# Altium PCB LEDConverter.PcbDoc
Units mm, origin at the board's own origin, x right, y up, seen from the top; angles counter-clockwise.
Board outline 30.4 x 49.6 mm, 2 copper layers (Top Layer, Bottom Layer); 16 components, 13 nets, 38 pads, 36 vias.
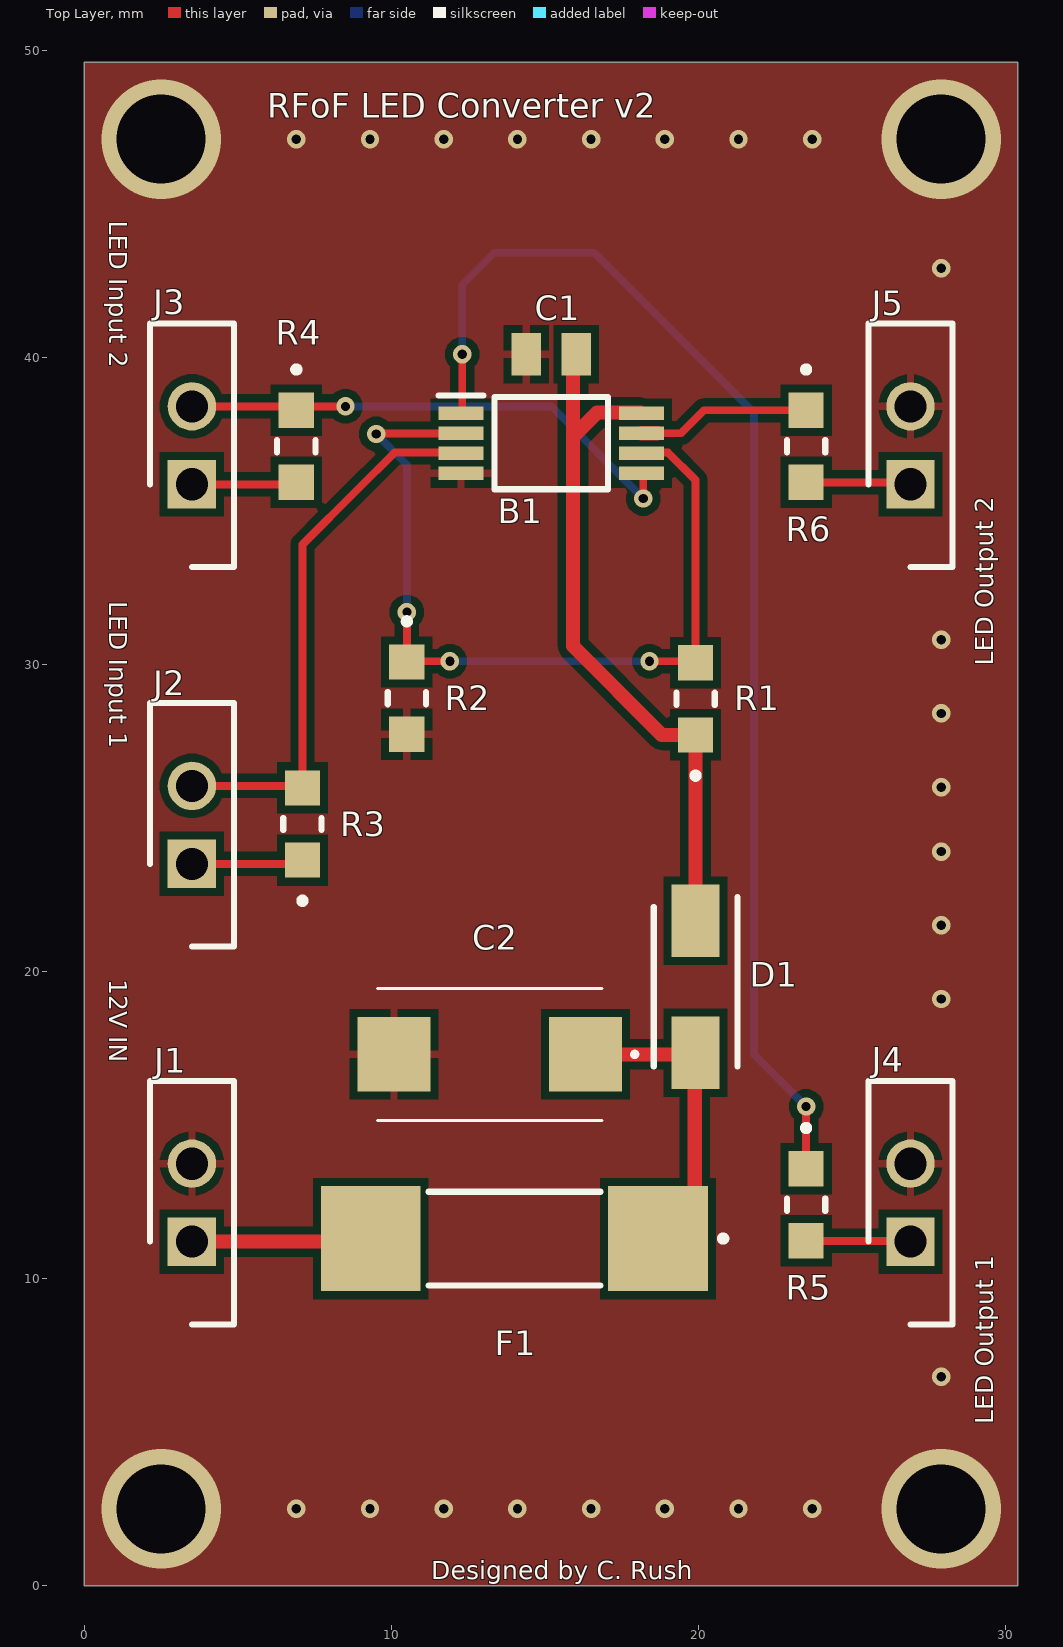
[diagram p0: Top Layer view]
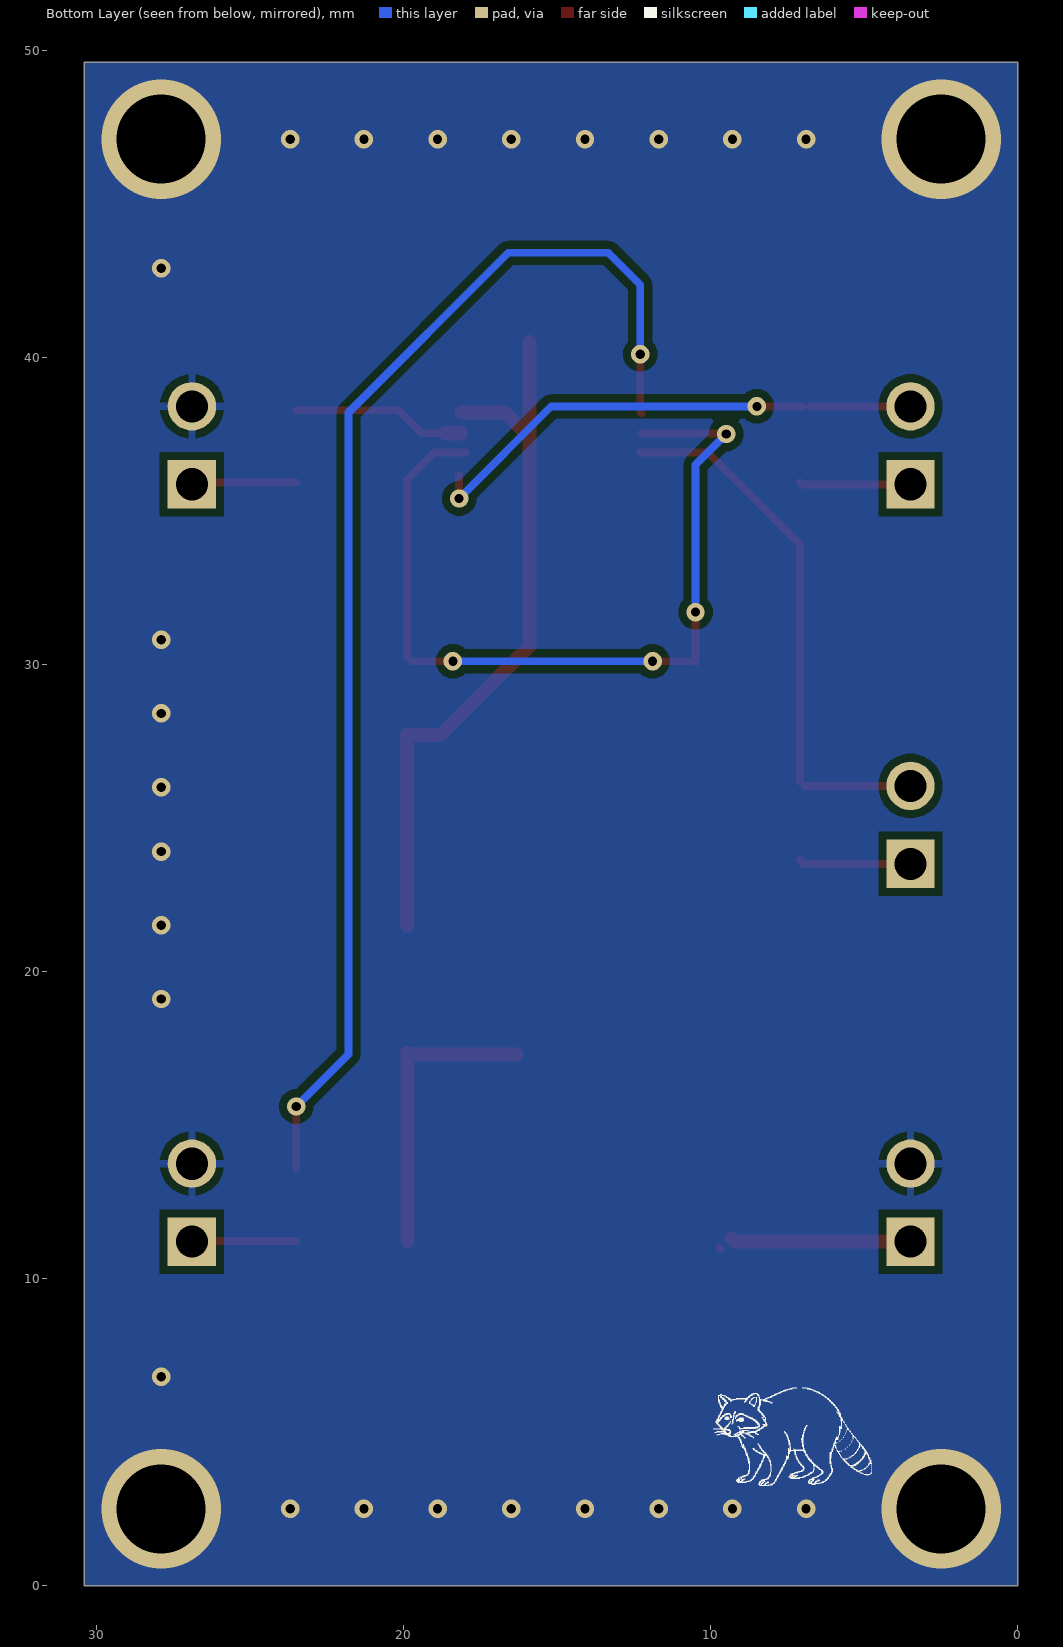
[diagram p1: Bottom Layer view, seen from below]

## Layer stack, top to bottom
Top Solder: solder mask 0.0102, Solder Resist, Dk 3.5
Top Layer: signal copper 0.0356
Dielectric 1: dielectric 0.32, FR-4, Dk 4.8
Bottom Layer: signal copper 0.0356
Bottom Solder: solder mask 0.0102, Solder Resist, Dk 3.5

## Board outline
0,0 0,49.6 30.4,49.6 30.4,0

## Design rules (kind name [scope] priority, off if disabled: settings)
Clearance [InNet('GND')] p1: gap=0.254 ignorepadtopadclearanceinfootprint=TRUE
ComponentClearance [All] p1: gap=0.01 collisioncheckmode=3 verticalgap=2540 showdistances=FALSE
PlaneConnect [InNet('GND')] p1: pad.planeconnectstyle=Relief pad.reliefexpansion=0.508 pad.reliefentries=4 pad.reliefconductorwidth=0.254 pad.reliefairgap=0.254 via.planeconnectstyle=Direct via.reliefexpansion=0.508 via.reliefentries=4 via.reliefconductorwidth=0.254 via.reliefairgap=0.254
PolygonConnect [All] p1: thpad.connectstyle=Relief thpad.reliefconductorwidth=0.254 thpad.reliefentries=4 thpad.polygonreliefangle="90 Angle" thpad.airgapwidth=0.254 smdpad.connectstyle=Relief smdpad.reliefconductorwidth=0.254 smdpad.reliefentries=4 smdpad.polygonreliefangle="90 Angle" smdpad.airgapwidth=0.254 via.connectstyle=Direct via.reliefconductorwidth=0.254 via.reliefentries=4 via.polygonreliefangle="90 Angle" via.airgapwidth=0.254
RoutingVias [All] p1: holewidth=0.711 width=1.27 viastyle="Through Hole" minholewidth=0.711 minwidth=1.27 maxholewidth=0.711 maxwidth=1.27
SolderMaskExpansion [All] p1: expansion=0.102 istentingtop=FALSE
SupplyNets "Schematic Supply Nets_1" [InNet('6V')] p1: voltage=0.000
SupplyNets "Schematic Supply Nets" [InNet('GND')] p2: voltage=0.000
UnpouredPolygon [InNet('GND')] p1:
Width [All] p1: maxlimit=0.762 minlimit=0.254 preferedwidth=0.254 minimp=50.000000 maximp=50.000000 favimp=50.000000
27 further rules are at their usual default settings.

## Components (designator, comment, footprint, x,y, rotation, side; value= is the part's Value field where it differs from the comment)
B1 "TLC3702IPWR" SOP65P640X120-8N 15.2,37.2 r0 top (schematic designator B?)
C1 "VJ0805Y105KXQTW1BC" CAPC2012X135N 15.2,40.1 r180 top
C2 "T491X107K025AT" T491X 13.2,17.3 r180 top
D1 "S1M" DIOM5227X270N 19.9,19.5 r270 top
F1 "0443.500DRLC" 0443500DR 14,11.3 r180 top
J1 "42375-1855" HDRV2W87P0X254_1X2_768X249X1494P 3.5,11.2 r90 top
J2 "42375-1855" HDRV2W87P0X254_1X2_768X249X1494P 3.5,23.5 r90 top
J3 "42375-1855" HDRV2W87P0X254_1X2_768X249X1494P 3.5,35.86 r90 top locked
J4 "42375-1855" HDRV2W87P0X254_1X2_768X249X1494P 26.9,11.2 r90 top locked
J5 "42375-1855" HDRV2W87P0X254_1X2_768X249X1494P 26.9,35.86 r90 top locked
R1 "2k Resistor" ERA6AEB101V 19.9,28.875 r90 top
R2 "2k Resistor" ERA6AEB101V 10.5,28.9 r270 top
R3 "2k Resistor" ERA6AEB101V 7.1,24.8 r90 top
R4 "2k Resistor" ERA6AEB101V 6.9,37.1 r270 top
R5 "2k Resistor" ERA6AEB101V 23.5,12.4 r270 top locked
R6 "2k Resistor" ERA6AEB101V 23.5,37.1 r270 top locked

## Footprints (in the part's own frame and the unit in brackets; to place one, negate y for a bottom-side part, rotate by r counter-clockwise, add the part's x,y. Pads: shape width x height; smd on the part's side, far side on the other; paste and mask are expansions set on the pad)
0443500DR [mm]
  rect 3.25x3.43 smd: 1(-4.675,0) 2(4.675,0)
  silkscreen extent -6.9,-1.53 2.8,1.53, body extent -5.04,-1.53 5.04,1.53, height 3.05
CAPC2012X135N [mm]
  rect 0.96x1.39 smd: 1(-0.81,0) 2(0.81,0)
DIOM5227X270N [mm]
  rect 2.35x1.55 smd: 1(-2.15,0) 2(2.15,0)
  silkscreen extent -2.93,-1.36 2.6,1.36
ERA6AEB101V [mm]
  rect 1.15x1.15 smd: 1(-1.175,0) 2(1.175,0)
  silkscreen extent -2.6,-0.63 0.2,0.63
HDRV2W87P0X254_1X2_768X249X1494P [mm]
  rect 1.575x1.575 / inner round 1.575 / far side rect 1.575x1.575 hole 1.05: 1(0,0)
  round 1.575 hole 1.05: 2(2.54,0)
  silkscreen extent -2.7,-1.37 5.24,1.37
SOP65P640X120-8N [mm]
  rect 1.475x0.45 smd: 1(-2.938,0.975) 2(-2.938,0.325) 3(-2.938,-0.325) 4(-2.938,-0.975) 5(2.938,-0.975) 6(2.938,-0.325) 7(2.938,0.325) 8(2.938,0.975)
  silkscreen extent -3.67,-1.5 1.85,1.55
T491X [mm]
  rect 2.37x2.43 smd: 1(-3.12,0) 2(3.12,0)
  silkscreen extent -4.77,-2.15 3.65,2.15, body extent -3.8,-2.3 3.8,2.3, height 4.31

## Part data
B1: "Texas Instruments TLC3702IPWR Dual Comparator, Push-Pull O/P, 5 V 8-Pin TSSOP", Manufacturer_Name="Texas Instruments", Mouser Part Number=595-TLC3702IPWR, Datasheet Link=http://www.ti.com/lit/gpn/TLC3702, Geometry.Height=1.2mm, Manufacturer_Part_Number=TLC3702IPWR, Mouser Price/Stock=https://www.mouser.co.uk/ProductDetail/Texas-Instruments/TLC3702IPWR?qs=p6lVfQR1GSqrayQICnP15w%3D%3D
C1: "Multilayer Ceramic Capacitors MLCC - SMD/SMT 0805 1uF 10volts X7R 10%", Manufacturer_Name=Vishay, Mouser Part Number=77-VJ0805Y105KXQTBC, Datasheet Link=https://www.vishay.com/docs/28548/vjw1bcbascomseries.pdf, Geometry.Height=1.35mm, Manufacturer_Part_Number=VJ0805Y105KXQTW1BC, Mouser Price/Stock=https://www.mouser.co.uk/ProductDetail/Vishay-Vitramon/VJ0805Y105KXQTW1BC?qs=F2lBERbFaaHnNHh23%2Flzkg%3D%3D
C2: "Capacitor Polarised", Manufacturer_Name=KEMET, Mouser Part Number=80-T491X107K025AT, Arrow Part Number=T491X107K025AT, Arrow Price/Stock=https://www.arrow.com/en/products/t491x107k025at/kemet-corporation?utm_currency=USD&region=nac, Datasheet Link=https://content.kemet.com/datasheets/KEM_T2005_T491.pdf, Height=4.3mm, Manufacturer_Part_Number=T491X107K025AT, Mouser Price/Stock=https://www.mouser.co.uk/ProductDetail/KEMET/T491X107K025AT?qs=QpHsZXO%252BQJ%252BKFgQiUckA6A%3D%3D
D1: "Glass passivated junction.; Low profile package.", Manufacturer_Name=onsemi, Mouser Part Number=512-S1M, Datasheet Link=https://www.onsemi.com/pub/Collateral/S1M-D.PDF, Geometry.Height=2.7mm, Manufacturer_Part_Number=S1M, Mouser Price/Stock=https://www.mouser.co.uk/ProductDetail/onsemi-Fairchild/S1M?qs=RJwZ8kJo1mhFujnIpzoJdg%3D%3D
F1: "Fuse", Manufacturer_Name=LITTELFUSE, Mouser Part Number=576-0443.500DRLC, Arrow Part Number=0443.500DRLC, Arrow Price/Stock=https://www.arrow.com/en/products/0443.500drlc/littelfuse?region=nac, Datasheet Link=https://www.littelfuse.com/~/media/electronics/datasheets/fuses/littelfuse_fuse_443_datasheet.pdf.pdf, Height=3.05mm, Manufacturer_Part_Number=0443.500DRLC, Mouser Price/Stock=https://www.mouser.co.uk/ProductDetail/Littelfuse/0443.500DRLC?qs=AQlKX63v8RvHlKjIINnTsQ%3D%3D
J1 J2 J3 J4 J5: "Headers & Wire Housings KK 100 Hdr Assy Bkw 02 Ckt Tin", Manufacturer_Name=Molex, Mouser Part Number=538-42375-1855, Datasheet Link=https://componentsearchengine.com/Datasheets/1/42375-1855.pdf, Geometry.Height=14.94mm, Manufacturer_Part_Number=42375-1855, Mouser Price/Stock=https://www.mouser.com/Search/Refine.aspx?Keyword=538-42375-1855
R1 R2 R3 R4 R5 R6: library part ERA-6AED4990V, "Metal Thin Film Chip Resistor, 0805, 0.125W", Manufacturer_Name=Panasonic, Datasheet Link=https://industrial.panasonic.com/cdbs/www-data/pdf/RDM0000/AOA0000C307.pdf, Geometry.Height=0.6mm, Manufacturer_Part_Number=ERA-6AED4990V

## Via types
v1: diameter 0.6, hole 0.3, Top Layer to Bottom Layer, 32 vias
v2: diameter 3.9, hole 2.9, Top Layer to Bottom Layer, 4 vias

## Nets (pads, with @x,y where several pads share a name; then routed paths per layer and width w, separated by ;. In a path a pad name is that pad's centre, name@x,y a point inside that pad or via, vN(x,y) a via of type N, cw(c..) or ccw(c..) an arc to the next point about the centre after c; other vN are vias at no path point)
6V: B1.2 B1.6 R1.2 R2.1 | length 27.9
  Top Layer w0.254: v1(9.5,37.5) 9.512,37.513 12.25,37.513 B1.2 ; R2.1 v1(10.5,31.7) ; R2.1@10.525,30.1 v1(11.9,30.1) ; B1.6@17.982,36.9 19,36.9 19.9,36 R1.2@19.9,30.249 ; v1(18.4,30.1) R1.2@19.751,30.1
  Bottom Layer w0.254: v1(9.5,37.5) 10.5,36.5 v1(10.5,31.7) ; v1(11.9,30.1) v1(18.4,30.1)
GND: B1.4 C1.2 C2.2 J1.2 J4.2 J5.2 R2.2
  other v1: 6.9,2.5 9.3,2.5 11.7,2.5 14.1,2.5 16.5,2.5 18.9,2.5 21.3,2.5 23.7,2.5 27.9,6.8 27.9,19.1 27.9,21.5 27.9,23.9 27.9,26 27.9,28.4 27.9,30.8 27.9,42.9 6.9,47.1 9.3,47.1 11.7,47.1 14.1,47.1 16.5,47.1 18.9,47.1 21.3,47.1 23.7,47.1
  other v2: 2.5,2.5 27.9,2.5 2.5,47.1 27.9,47.1
NetB1_1: B1.1 R5.1 | length 41.6
  Top Layer w0.254: B1.1 12.3,38.213 v1(12.3,40.1) ; R5.1 v1(23.5,15.6)
  Bottom Layer w0.254: v1(12.3,40.1) 12.3,42.359 13.341,43.4 16.6,43.4 21.8,38.2 21.8,17.3 v1(23.5,15.6)
NetB1_3: B1.3 J2.2 R3.2 | length 17.6
  Top Layer w0.254: J2.2 R3.2@6.951,26.04 ; R3.2@7.1,26.189 7.1,33.9 8.9,35.7 10.1,36.9 B1.3@12.3,36.9
NetB1_5: B1.5 J3.2 R4.1 | length 16.5
  Top Layer w0.254: J3.2 R4.1@6.775,38.4 ; R4.1@7.025,38.4 v1(8.5,38.4) ; v1(18.2,35.4) B1.5@18.2,36.163
  Bottom Layer w0.254: v1(8.5,38.4) 15.2,38.4 v1(18.2,35.4)
NetB1_7: B1.7 R6.1 | length 5.7
  Top Layer w0.254: B1.7@18.643,37.525 19.425,37.525 20.175,38.275 R6.1
  Top Layer w0.457: B1.7 B1.7@18.643,37.525
NetB1_8: B1.8 C1.1 D1.1 R1.1 | length 23.9
  Top Layer w0.254: B1.8@18.113,38.2 B1.8
  Top Layer w0.457: C1.1@15.91,40.5 15.91,37.41 ; B1.8@18.113,38.2 16.7,38.2 15.91,37.41 ; D1.1@19.9,21.489 D1.1 R1.1 18.8,27.7 15.91,30.59 15.91,37.41
NetC2_1: C2.1 D1.2 F1.1 | length 9.6
  Top Layer w0.457: C2.1 19.85,17.3 D1.2 ; F1.1@19.875,11.2 D1.2@19.875,17.18
NetF1_2: F1.2 J1.1 | length 5.9
  Top Layer w0.254: F1.2@9.685,10.96 F1.2@9.725,11
  Top Layer w0.457: J1.1 9.225,11.2 F1.2
NetJ2_1: J2.1 R3.1 | length 3.7
  Top Layer w0.254: J2.1 6.975,23.5 R3.1
NetJ3_1: J3.1 R4.2 | length 3.6
  Top Layer w0.254: J3.1 7.035,35.86 R4.2@7.1,35.925
NetJ4_1: J4.1 R5.2 | length 3.4
  Top Layer w0.254: R5.2 26.875,11.225 J4.1
NetJ5_1: J5.1 R6.2 | length 3.4
  Top Layer w0.254: R6.2 26.835,35.925 J5.1

## Polygon pours and split planes (outlines as drawn)
GND on Bottom Layer "GND_L02_P002" (solid, pour order 2): 0,49.6 30.4,49.6 30.4,0 0,0
GND on Top Layer "GND_L01_P000" (solid, pour order 0): 0,49.6 30.4,49.6 30.4,0 0,0

## Silkscreen, mask and mechanical layers (free items; w line width, h text height)
Top Overlay:
  text "RFoF LED Converter v2" at 5.95,47.8 h0.8
  text "LED Input 2" at 0.8,44.45 h0.6 r270
  text "LED Input 1" at 0.8,32.05 h0.6 r270
  text "LED Output 2" at 29.6,29.95 h0.6 r90
  text "12V IN" at 0.8,19.75 h0.6 r270
  text "LED Output 1" at 29.6,5.25 h0.6 r90
  text "Designed by C. Rush" at 11.3,0.2 h0.6
Bottom Overlay:
  drawing of 78 lines, arcs and shapes, not listed